# Altium PCB TouchMyHeart.PcbDoc
Units mm, origin at the board's own origin, x right, y up, seen from the top; angles counter-clockwise.
Board outline 75.71 x 66.14 mm, 2 copper layers (Top Layer, Bottom Layer); 62 components, 52 nets, 167 pads, 90 vias.
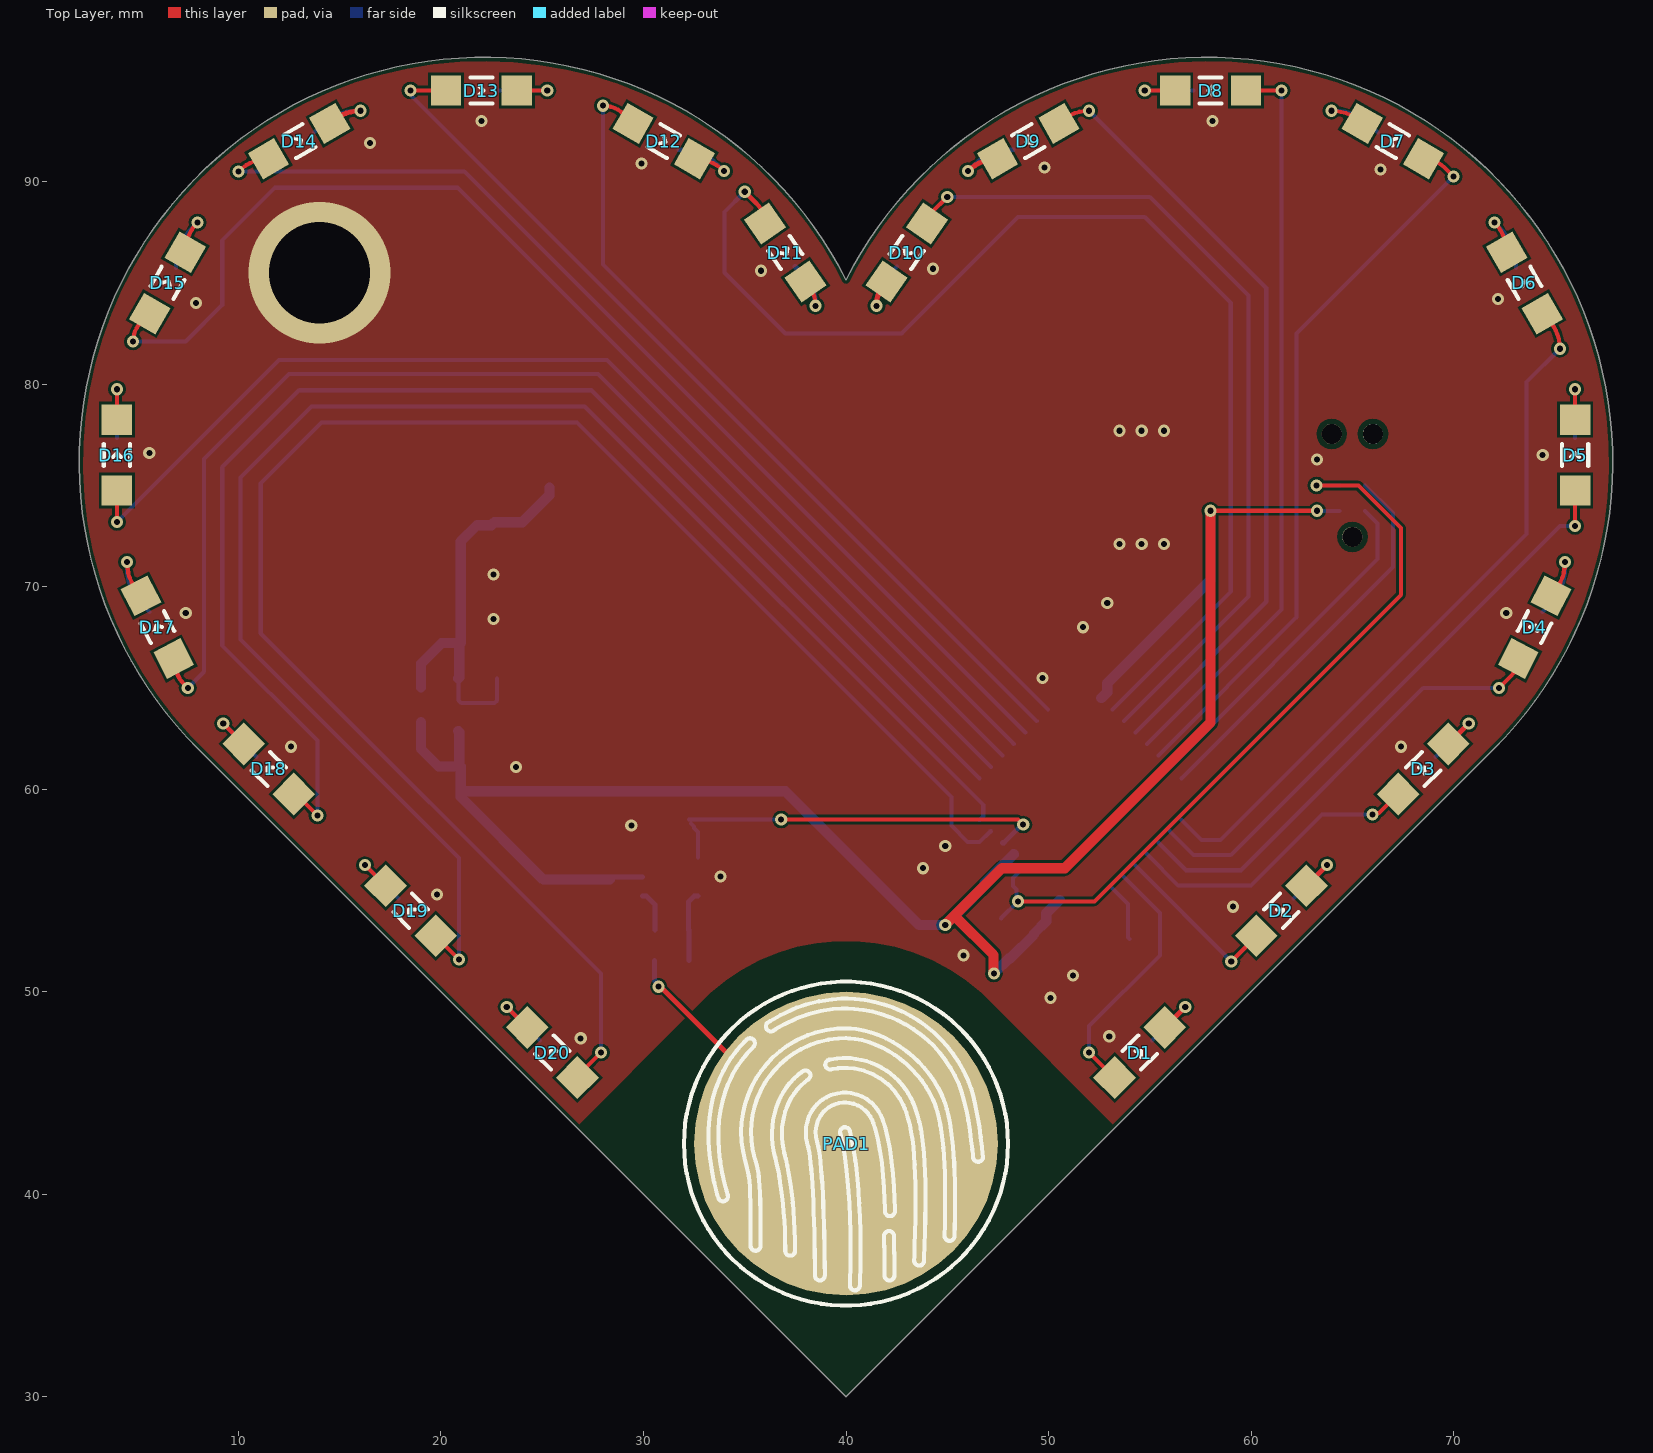
[diagram p0: Top Layer view]
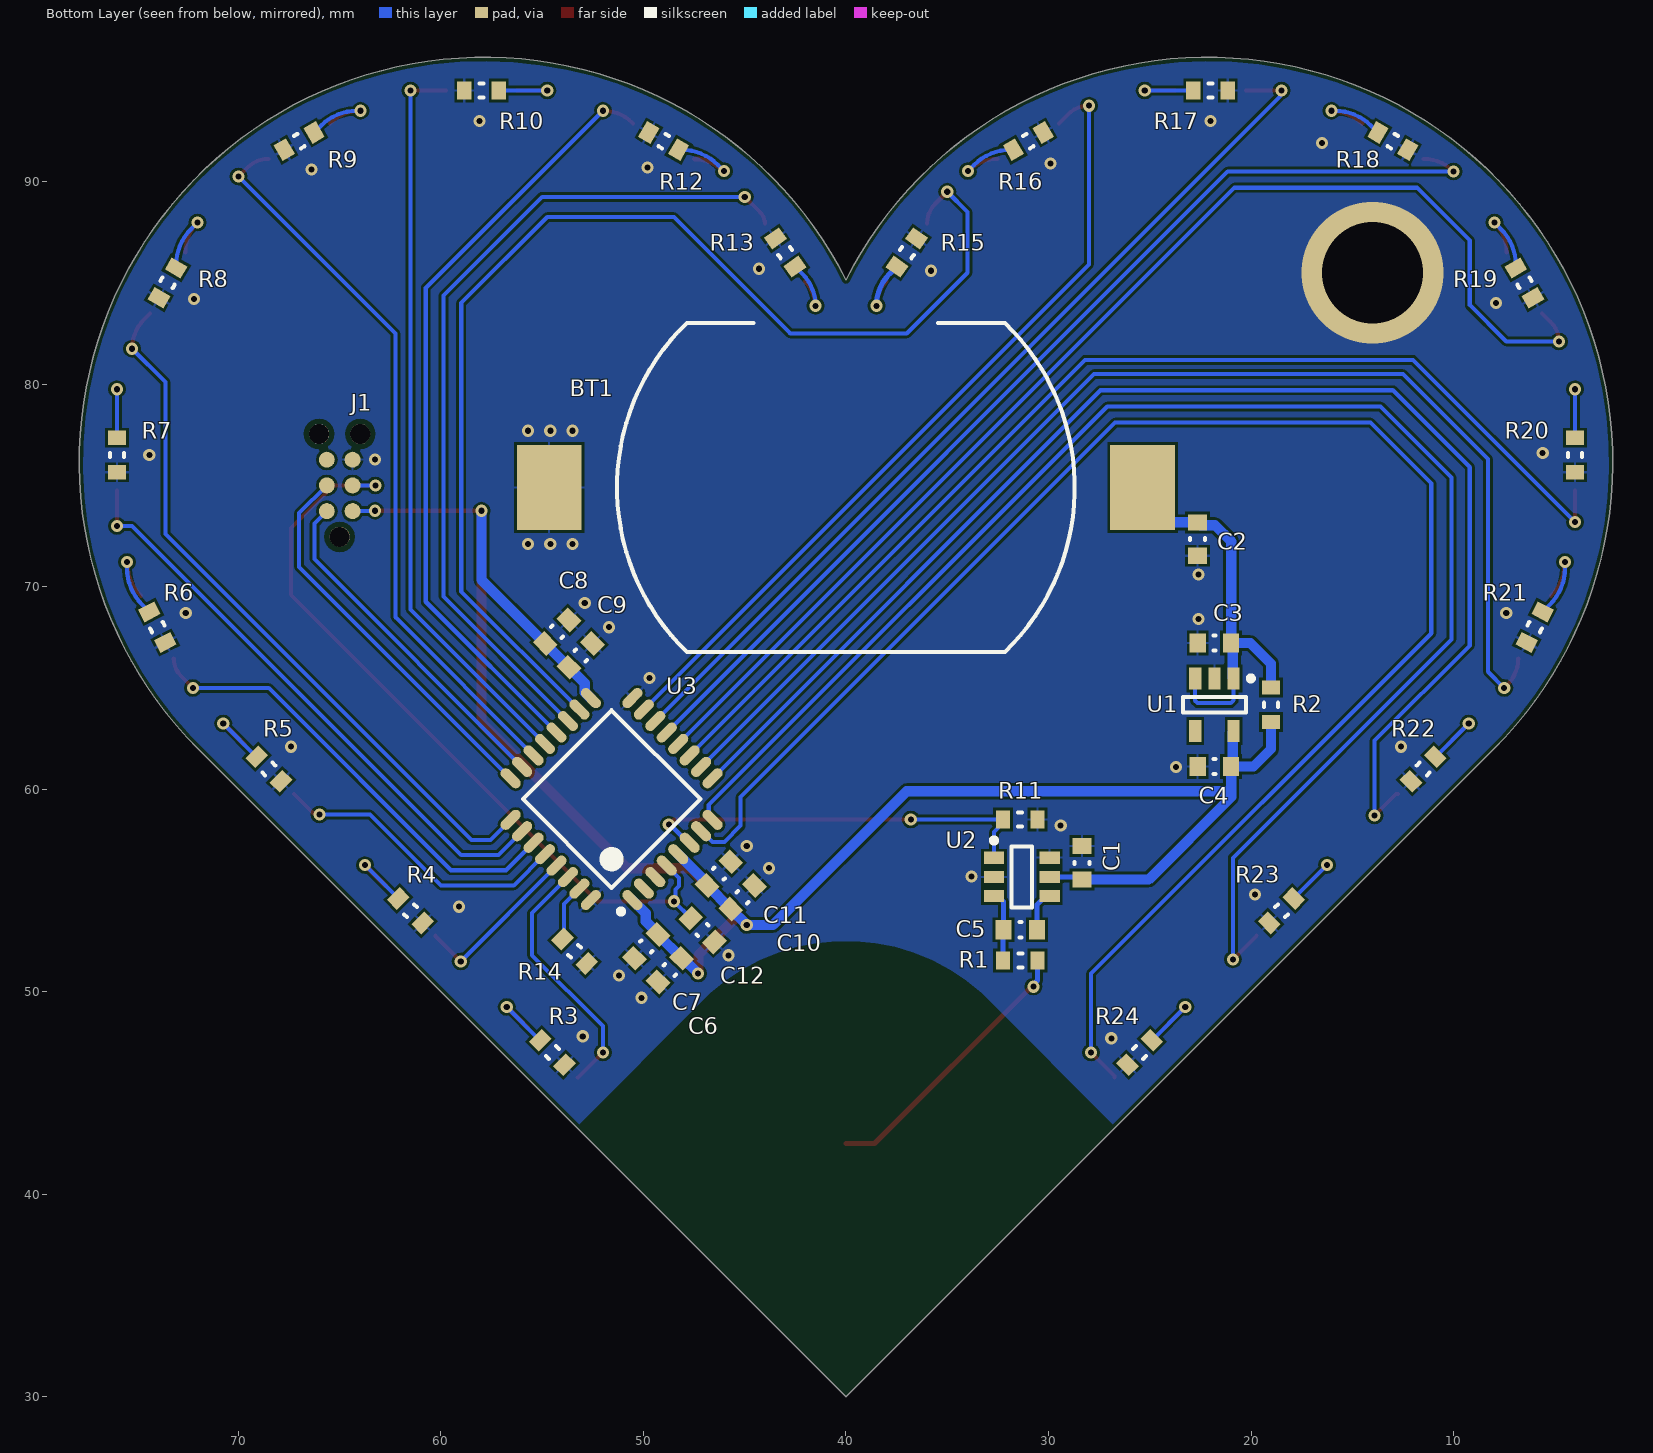
[diagram p1: Bottom Layer view, seen from below]
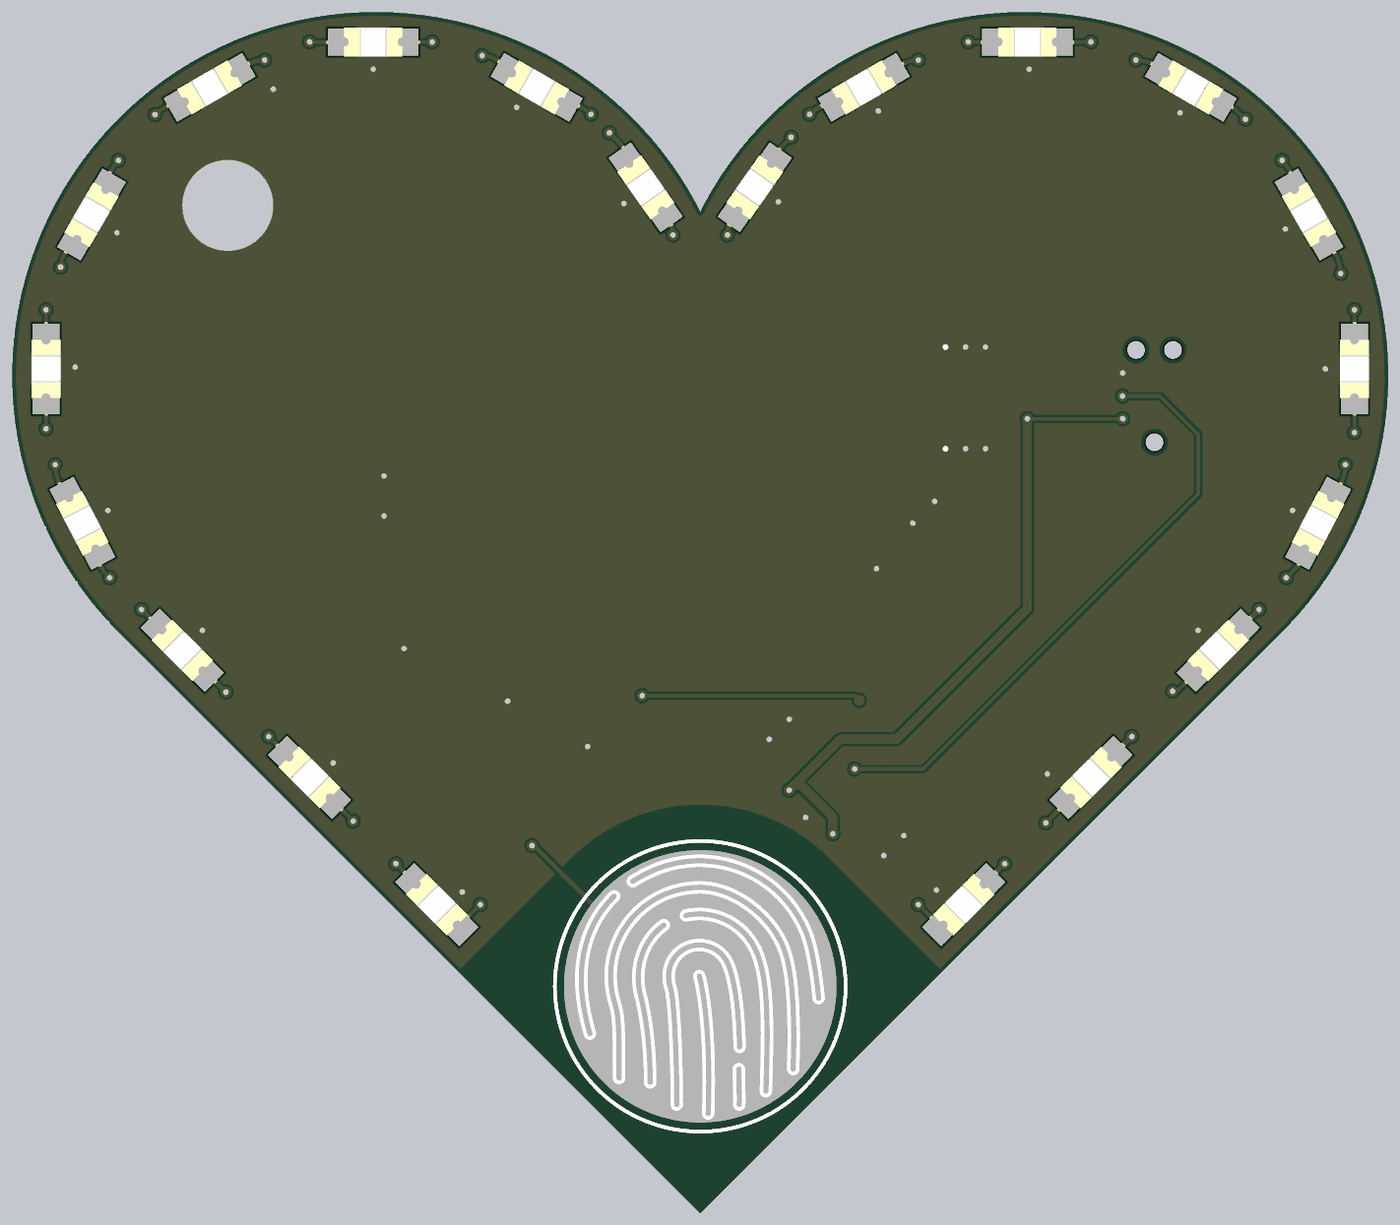
[diagram p2: 3D render of the assembled board from above, using the file's embedded part models]
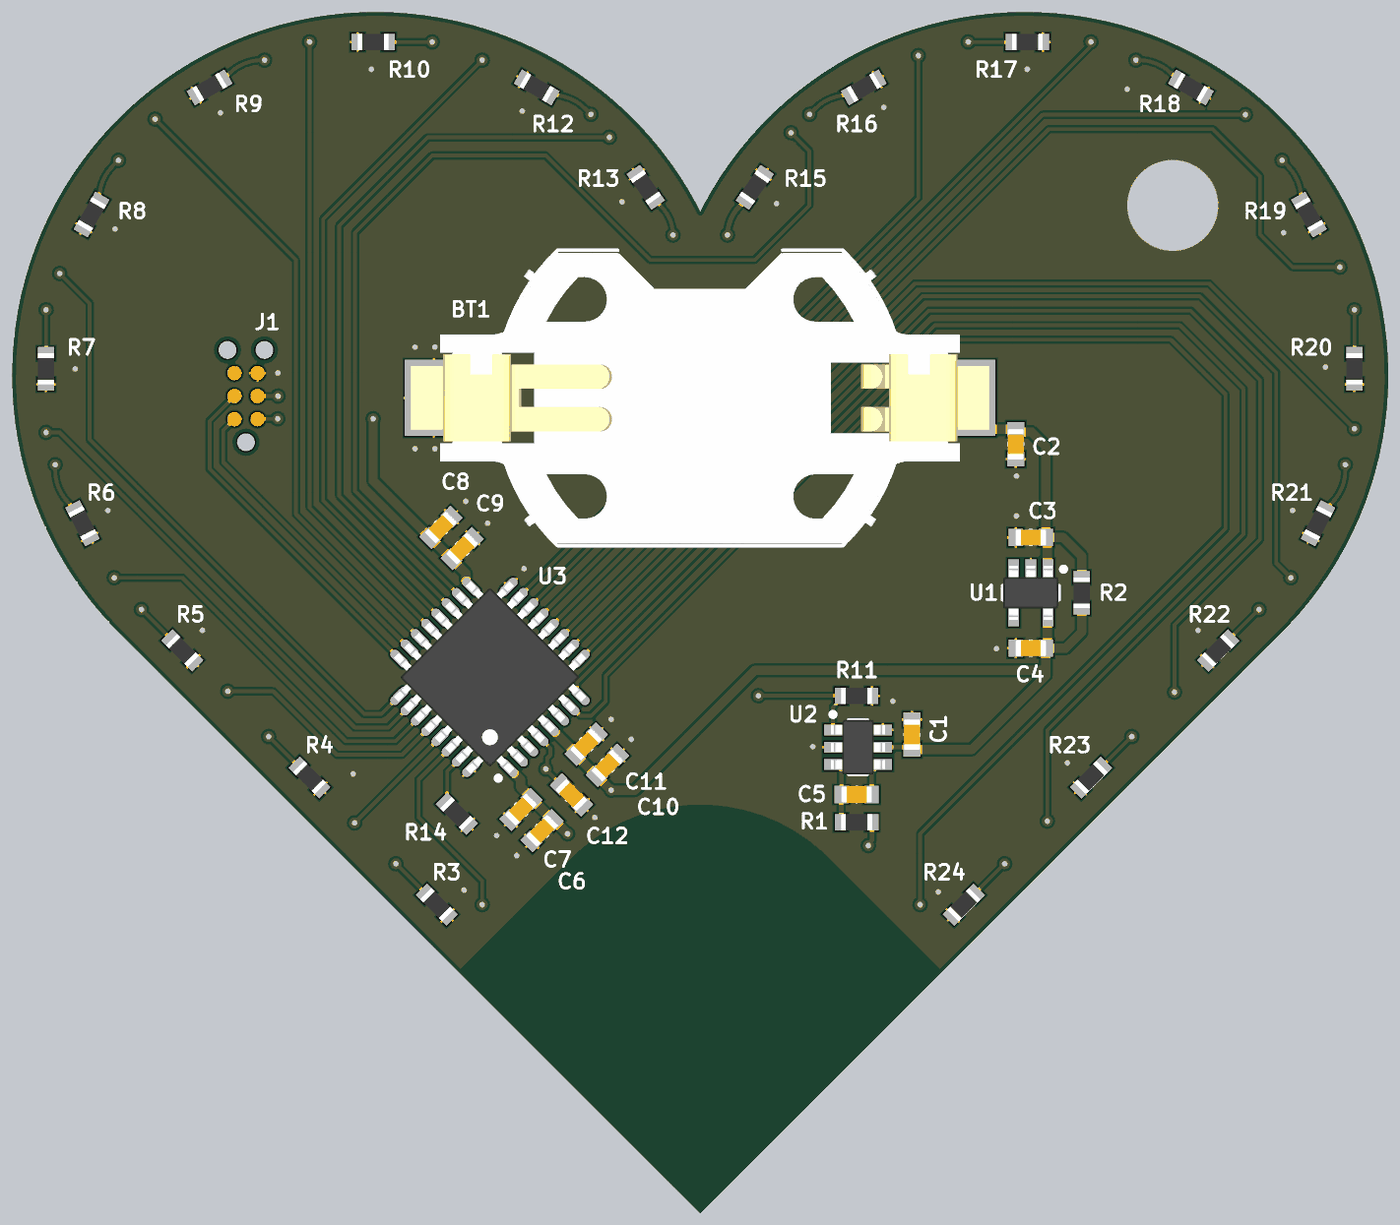
[diagram p3: 3D render of the assembled board from below, using the file's embedded part models]

## Layer stack, top to bottom
Top Solder: solder mask 0.0102, Solder Resist, Dk 3.5
Top Layer: signal copper 0.0356
Dielectric 1: dielectric 0.32, FR-4, Dk 4.8
Bottom Layer: signal copper 0.0356
Bottom Solder: solder mask 0.0102, Solder Resist, Dk 3.5

## Board outline
40,30 8,62 cw(c22.142,76.142) 40,85.148 cw(c57.858,76.142) 72,62

## Design rules (kind name [scope] priority, off if disabled: settings)
BoardOutlineClearance [All] p1: gap=0.2 ignorepadtopadclearanceinfootprint=FALSE
Clearance [All] p1: gap=0.127 ignorepadtopadclearanceinfootprint=FALSE except(0.25: Arc-Hole Track-Hole SMDPad-Hole THPad-Hole Via-Hole Fill-Hole Poly-Hole Region-Hole Text-Hole)
ComponentClearance [All] p1: gap=0.127 collisioncheckmode=3 verticalgap=0.127 showdistances=TRUE
DiffPairsRouting [All] p1: maxlimit=0.254 minlimit=0.127 mostfreqgap=0.127 toplayer_minwidth=0.127 toplayer_maxwidth=25.4 toplayer_prefwidth=0.127 bottomlayer_minwidth=0.127 bottomlayer_maxwidth=25.4 bottomlayer_prefwidth=0.127 maxuncoupledlength=12.7
Height [All] p1: minheight=0 maxheight=1816.048 prefheight=12.7
HoleSize [All] p1: absolutevalues=TRUE maxlimit=6.3 minlimit=0.3 maxpercent=80.000 minpercent=20.000
HoleToHoleClearance [All] p1: gap=0.25 allowstackedmicrovias=FALSE
MinimumAnnularRing [All] p1: minimumring=0.076
MinimumSolderMaskSliver [All] p1: minsoldermaskwidth=0
PlaneClearance [All] p1: clearance=0.127
PlaneConnect PlaneConnectPowerPads [InPadClass('PowerPads')] p1: planeconnectstyle=Direct reliefexpansion=0.508 reliefentries=4 reliefconductorwidth=0.254 reliefairgap=0.254
PlaneConnect [All] p2: pad.planeconnectstyle=Relief pad.reliefexpansion=0.3 pad.reliefentries=4 pad.reliefconductorwidth=0.127 pad.reliefairgap=0.127 via.planeconnectstyle=Direct via.reliefexpansion=0.3 via.reliefentries=4 via.reliefconductorwidth=0.127 via.reliefairgap=0.127
PolygonConnect PolygonConnectPowerPads [All vs (InPadClass('PowerPads'))] p1: connectstyle=Direct reliefconductorwidth=0.254 reliefentries=4 polygonreliefangle="90 Angle" airgapwidth=0.254
PolygonConnect [All] p2: thpad.connectstyle=Relief thpad.reliefconductorwidth=0.127 thpad.reliefentries=4 thpad.polygonreliefangle="90 Angle" thpad.airgapwidth=0.127 smdpad.connectstyle=Relief smdpad.reliefconductorwidth=0.127 smdpad.reliefentries=4 smdpad.polygonreliefangle="90 Angle" smdpad.airgapwidth=0.127 via.connectstyle=Direct via.reliefconductorwidth=0.127 via.reliefentries=4 via.polygonreliefangle="90 Angle" via.airgapwidth=0.127
RoutingVias [All] p1: holewidth=0.3 width=0.6 viastyle="Through Hole" minholewidth=0.3 minwidth=0.6 maxholewidth=0.6 maxwidth=6.6
SilkToSilkClearance [All] p1: silktosilkclearance=0
SilkToSolderMaskClearance [IsPad] p1: minsilkscreentomaskgap=0.127 clearancetoexposedcopper=TRUE
SolderMaskExpansion SolderMaskExpansion_Via [isVia] p1: expansion=0.102 istentingtop=TRUE
SolderMaskExpansion [All] p2: expansion=0.075 istentingtop=FALSE
Width [All] p1: maxlimit=25.4 minlimit=0.127 preferedwidth=0.127 minimp=50.000000 maximp=50.000000 favimp=50.000000
20 further rules are at their usual default settings.

## Components (designator, comment, footprint, x,y, rotation, side; value= is the part's Value field where it differs from the comment)
BT1 "BU2032SM-BT-GTR" BU2032SM-BT-GTR 40.007,74.9 r0 bottom
C1 "Capacitor" CAPC1608X09N 28.345,56.364 r270 bottom value=0.1uF
C2 "Capacitor" CAPC1608X09N 22.64,72.351 r90 bottom value=1uF
C3 "Capacitor" CAPC1608X09N 21.809,67.218 r180 bottom value=1uF
C4 "Capacitor" CAPC1608X09N 21.809,61.122 r180 bottom value=1uF
C5 "Capacitor" CAPC1608X09N 31.393,53.062 r0 bottom value=10nF
C6 "Capacitor" CAPC1608X09N 48.699,51.073 r135 bottom value=1uF
C7 "Capacitor" CAPC1608X09N 49.867,52.24 r135 bottom value=0.1uF
C8 "Capacitor" CAPC1608X09N 54.267,67.776 r315 bottom value=1uF
C9 "Capacitor" CAPC1608X09N 53.1,66.608 r315 bottom value=0.1uF
C10 "Capacitor" CAPC1608X09N 45.107,54.665 r315 bottom value=1uF
C11 "Capacitor" CAPC1608X09N 46.275,55.832 r315 bottom value=0.1uF
C12 "Capacitor" CAPC1608X09N 47.083,53.048 r45 bottom value=0.1uF
D1 "LED" DIOC3216X11N 54.5,47 r45 top
D2 "LED" DIOC3216X11N 61.5,54 r45 top
D3 "LED" DIOC3216X11N 68.5,61 r45 top
D4 "LED" DIOC3216X11N 74,68 r62.5 top
D5 "LED" DIOC3216X11N 76,76.5 r90 top
D6 "LED" DIOC3216X11N 73.5,85 r120 top
D7 "LED" DIOC3216X11N 67,92 r150 top
D8 "LED" DIOC3216X11N 58,94.5 r180 top
D9 "LED" DIOC3216X11N 49,92 r210 top
D10 "LED" DIOC3216X11N 43,86.5 r235 top
D11 "LED" DIOC3216X11N 37,86.5 r305 top
D12 "LED" DIOC3216X11N 31,92 r330 top
D13 "LED" DIOC3216X11N 22,94.5 r0 top
D14 "LED" DIOC3216X11N 13,92 r30 top
D15 "LED" DIOC3216X11N 6.5,85 r60 top
D16 "LED" DIOC3216X11N 4,76.5 r90 top
D17 "LED" DIOC3216X11N 6,68 r117.5 top
D18 "LED" DIOC3216X11N 11.5,61 r135 top
D19 "LED" DIOC3216X11N 18.5,54 r135 top
D20 "LED" DIOC3216X11N 25.5,47 r135 top
J1 "TC2030-NL" TC2030-NL 65,75 r90 bottom
PAD1 "" CAPACTIVE_TOUCH 40,42.5 r0 top
R1 "Resistor" RESC1608X06N 31.393,51.538 r0 bottom value=10k
R2 "Resistor" RESC1608X06N 19.015,64.17 r90 bottom value=0
R3 "Resistor" RESC1608X06N 54.5,47 r225 bottom value=1k
R4 "Resistor" RESC1608X06N 61.5,54 r225 bottom value=1k
R5 "Resistor" RESC1608X06N 68.5,61 r225 bottom value=1k
R6 "Resistor" RESC1608X06N 74,68 r242.5 bottom value=1k
R7 "Resistor" RESC1608X06N 76,76.5 r270 bottom value=1k
R8 "Resistor" RESC1608X06N 73.5,85 r300 bottom value=1k
R9 "Resistor" RESC1608X06N 67,92 r330 bottom value=1k
R10 "Resistor" RESC1608X06N 58,94.5 r0 bottom value=1k
R11 "Resistor" RESC1608X06N 31.4,58.5 r0 bottom value=100k
R12 "Resistor" RESC1608X06N 49,92 r30 bottom value=1k
R13 "Resistor" RESC1608X06N 43,86.5 r55 bottom value=1k
R14 "Resistor" RESC1608X06N 53.4,52 r45 bottom value=10k
R15 "Resistor" RESC1608X06N 37,86.5 r125 bottom value=1k
R16 "Resistor" RESC1608X06N 31,92 r150 bottom value=1k
R17 "Resistor" RESC1608X06N 22,94.5 r180 bottom value=1k
R18 "Resistor" RESC1608X06N 13,92 r210 bottom value=1k
R19 "Resistor" RESC1608X06N 6.5,85 r240 bottom value=1k
R20 "Resistor" RESC1608X06N 4,76.5 r270 bottom value=1k
R21 "Resistor" RESC1608X06N 6,68 r297.5 bottom value=1k
R22 "Resistor" RESC1608X06N 11.5,61 r315 bottom value=1k
R23 "Resistor" RESC1608X06N 18.5,54 r315 bottom value=1k
R24 "Resistor" RESC1608X06N 25.5,47 r315 bottom value=1k
U1 "TLV75533PDBVR" SOT95P280X145-5N 21.809,64.17 r270 bottom
U2 "AT42QT1011-TSHR" SOT95P280X145-6N 31.32,55.669 r180 bottom
U3 "STM32L031K6T6" TQFP80P900X900X160-32N 51.573,59.514 r45 bottom

## Footprints (in the part's own frame and the unit in brackets; to place one, negate y for a bottom-side part, rotate by r counter-clockwise, add the part's x,y. Pads: shape width x height; smd on the part's side, far side on the other; paste and mask are expansions set on the pad)
BU2032SM-BT-GTR [mm] "BATTERY HOLDER COIN 20MM SMD"
  rect 3.2x4.2 smd: B+(-14.65,0) B-(14.65,0)
  silkscreen extent -11.3,-8.13 11.3,8.13, body extent -15.93,-8 15.93,8, height 5.2
CAPACTIVE_TOUCH [mm] "Capactive touch button"
  round 15 smd mask+0.102: 1(0,0)
  silkscreen extent -8,-8 8,8
CAPC1608X09N [mm] "Chip Capacitor, 2-Leads, Body 1.60x0.80mm, IPC Medium Density"
  rect 0.8x0.95 smd: 1(-0.825,0) 2(0.825,0)
  silkscreen extent -0.05,-0.38 0.05,0.38, body extent -0.85,-0.45 0.85,0.45, height 0.9
DIOC3216X11N [mm] "Chip Diode, 2-Leads, Body 3.20x1.60mm, IPC Medium Density"
  rect 1.5x1.5 smd: 1(-1.75,0) 2(1.75,0)
  silkscreen extent -0.55,-0.65 0.55,0.65, body extent -1.6,-0.8 1.6,0.8, height 1.1
RESC1608X06N [mm] "Chip Resistor, 2-Leads, Body 1.60x0.80mm, IPC Medium Density"
  rect 0.7x0.9 smd: 1(-0.85,0) 2(0.85,0)
  silkscreen extent -0.1,-0.35 0.1,0.35, body extent -0.85,-0.45 0.85,0.45, height 0.55
SOT95P280X145-5N [mm] "SOT23, 5-Leads, Body 2.90x2.80mm, Pitch 0.95mm, IPC Medium Density"
  rect 1.1x0.6 smd: 1(-1.3,0.95) 2(-1.3,0) 3(-1.3,-0.95) 4(1.3,-0.95) 5(1.3,0.95)
  silkscreen extent -1.42,-1.55 0.38,1.92, body extent -1.5,-1.53 1.5,1.52, height 1.45
SOT95P280X145-6N [mm] "SOT23, 6-Leads, Body 2.90x2.80mm, Pitch 0.95mm, IPC Medium Density"
  rect 1x0.6 smd: 1(-1.375,0.95) 2(-1.375,0) 3(-1.375,-0.95) 4(1.375,-0.95) 5(1.375,0) 6(1.375,0.95)
  silkscreen extent -1.5,-1.5 0.5,1.92, body extent -1.5,-1.5 1.5,1.5, height 1.45
TC2030-NL [mil] "6-Pin Tag-Connect"
  round 30.98 smd paste-39.37: 1(-50,-25) 2(-50,25) 3(0,-25) 4(0,25) 5(50,-25) 6(50,25)
  round 39.02 hole 39.02 unplated: ""(-100,0) ""(100,-40) ""(100,40)
TQFP80P900X900X160-32N [mm] "TQFP, 32-Leads, Body 7.00x7.00mm, Pitch 0.80mm, IPC Medium Density"
  oval 1.2x0.5 smd: 1(-4.25,2.8) 2(-4.25,2) 3(-4.25,1.2) 4(-4.25,0.4) 5(-4.25,-0.4) 6(-4.25,-1.2) 7(-4.25,-2) 8(-4.25,-2.8) 17(4.25,-2.8) 18(4.25,-2) 19(4.25,-1.2) 20(4.25,-0.4) 21(4.25,0.4) 22(4.25,1.2) 23(4.25,2) 24(4.25,2.8)
  oval 0.5x1.2 smd: 9(-2.8,-4.25) 10(-2,-4.25) 11(-1.2,-4.25) 12(-0.4,-4.25) 13(0.4,-4.25) 14(1.2,-4.25) 15(2,-4.25) 16(2.8,-4.25) 25(2.8,4.25) 26(2,4.25) 27(1.2,4.25) 28(0.4,4.25) 29(-0.4,4.25) 30(-1.2,4.25) 31(-2,4.25) 32(-2.8,4.25)
  silkscreen extent -4.37,-3.1 3.1,3.72, body extent -4.5,-4.5 4.5,4.5, height 1.6

## Part data
BT1: "BATTERY HOLDER COIN 20MM SMD", Case/Package=SMD/SMT, Manufacturer="Memory Protection Devices", Max Operating Temperature=280°C, Min Operating Temperature=-40°C, Package Quantity=400, Category=Uncategorized, ComponentLink1Description=https://datasheet.ciiva.com/4/bu2032sm-bt-gtr-datasheet-4065.pdf?src-supplier=Digi-Key, ComponentLink1URL=https://datasheet.ciiva.com/4/bu2032sm-bt-gtr-datasheet-4065.pdf?src-supplier=Digi-Key, ComponentLink2Description=https://datasheet.ciiva.com/7613/bu2032sm-bt-gtr-datasheet-7613477.pdf?src-supplier=Digi-Key, ComponentLink2URL=https://datasheet.ciiva.com/7613/bu2032sm-bt-gtr-datasheet-7613477.pdf?src-supplier=Digi-Key, ComponentLink3Description=https://datasheet.ciiva.com/7613/bu2032sm-bt-gtr-datasheet-7613478.pdf?src-supplier=Digi-Key, ComponentLink3URL=https://datasheet.ciiva.com/7613/bu2032sm-bt-gtr-datasheet-7613478.pdf?src-supplier=Digi-Key, Manufacturer Part Number=BU2032SM-BT-GTR, Mount="Surface Mount,PCB", Number of Cells=1, Pricing 1="1=0.85000, 10=0.71300, 50=0.62520, 100=0.58940 (USD)", RoHS=Yes, Stock 1=7659, Supplier 1=Digi-Key, Termination=SMD/SMT
C1 C5 C7 C9 C11 C12: "General purpose capacitor", Package=0603, Rated Voltage=50V
C2 C3 C4 C6 C8 C10: "General purpose capacitor", Package=0603, Rated Voltage=25V
D1 D2 D3 D4 D5 D6 D7 D8 D9 D10 D11 D12 D13 D14 D15 D16 D17 D18 D19 D20: "General purpose LED"
J1: "6-Pin No-Legs Tag-Connect Plug-of-Nails™ Cable with Ribbon Connector"
PAD1: library part CAPACITIVE_TOUCH, "Capacitive Touch Button"
R1 R2 R3 R4 R5 R6 R7 R8 R9 R10 R11 R12 R13 R14 R15 R16 R17 R18 R19 R20 R21 R22 R23 R24: "General purpose resistor", Package=0603
  R2: Note="NO STUFF"
U1: "IC REG LINEAR 3.3V 500MA SOT23-5", Manufacturer="Texas Instruments", Max Operating Temperature=125°C, Min Operating Temperature=-40°C, ComponentLink1Description=http://www.ti.com/lit/ds/symlink/tlv755p.pdf?src-supplier=Digi-Key, ComponentLink1URL=http://www.ti.com/lit/ds/symlink/tlv755p.pdf?src-supplier=Digi-Key, Manufacturer Part Number=TLV75533PDBVR, Pricing 1="1=0.63000, 10=0.55100, 100=0.39250, 500=0.31730, 1000=0.24215 (USD)", RoHS=No, Stock 1=25120, Supplier 1=Digi-Key
U2: "Touch Sensor IC 6-Pin SOT-23, HOLD", Case/Package=SOT-23-6, Load Capacitance=50pF, Manufacturer="Microchip / Atmel", Max Operating Temperature=85°C, Max Supply Voltage=5.5V, Min Operating Temperature=-40°C, Min Supply Voltage=1.8V, Nominal Supply Current=729uA, Operating Supply Current=378.5uA, Package Quantity=4500, Category=Uncategorized, ComponentLink1Description=https://datasheet.ciiva.com/14094/at42qt1011-eng-tds-14094872.pdf?src-supplier=Distrelec, ComponentLink1URL=https://datasheet.ciiva.com/14094/at42qt1011-eng-tds-14094872.pdf?src-supplier=Distrelec, ComponentLink2Description=https://datasheet.ciiva.com/1165/731627-1165685.pdf?src-supplier=Element14, ComponentLink2URL=https://datasheet.ciiva.com/1165/731627-1165685.pdf?src-supplier=Element14, ComponentLink3Description=https://datasheet.ciiva.com/1403/doc8287-1403456.pdf?src-supplier=Digi-Key, ComponentLink3URL=https://datasheet.ciiva.com/1403/doc8287-1403456.pdf?src-supplier=Digi-Key, ComponentLink4Description=https://datasheet.ciiva.com/1403/doc8287-1403458.pdf?src-supplier=Digi-Key, ComponentLink4URL=https://datasheet.ciiva.com/1403/doc8287-1403458.pdf?src-supplier=Digi-Key, ComponentLink5Description=https://datasheet.ciiva.com/15222/getdatasheetpartid-463081-15222284.pdf?src-supplier=Verical, ComponentLink5URL=https://datasheet.ciiva.com/15222/getdatasheetpartid-463081-15222284.pdf?src-supplier=Verical, ComponentLink6Description=https://datasheet.ciiva.com/1403/doc8287-1403457.pdf?src-supplier=Digi-Key, ComponentLink6URL=https://datasheet.ciiva.com/1403/doc8287-1403457.pdf?src-supplier=Digi-Key, Height=1.3mm, Lead Free="Lead Free", Length=3mm, Manufacturer Part Number=AT42QT1011-TSHR, Mount="Surface Mount", Number of Channels=1, Number of Inputs=1, Number of Pins=6, Packaging="Tape and Reel", Pricing 1="4500=0.48000 (USD)", REACH SVHC="No SVHC", Resolution=14b, RoHS=Yes, Supplier 1=Digi-Key, Touchscreen=Capacitive, Width=1.75mm
U3: "IC MCU 32BIT 32KB FLASH 32LQFP", Case/Package=LQFP, Frequency=32MHz, Manufacturer=STMicroelectronics, Max Operating Temperature=85°C, Max Supply Voltage=3.6V, Min Operating Temperature=-40°C, Min Supply Voltage=1.65V, Package Quantity=1500, Category=Microcontrollers, ComponentLink1Description=https://datasheet.ciiva.com/70238/en-dm00140359-70238919.pdf?src-supplier=Digi-Key, ComponentLink1URL=https://datasheet.ciiva.com/70238/en-dm00140359-70238919.pdf?src-supplier=Digi-Key, Core Architecture=ARM, Data Bus Width=32b, Interface=I2C,SPI,UART, Manufacturer Part Number=STM32L031K6T6, Max Frequency=32MHz, Memory Size=32KB, Memory Type=FLASH, Number of ADC Channels=10, Number of I/Os=38, Oscillator Type=Internal, Packaging=Tray, Peripherals="Brown-out Detect/Reset,POR,PWM,WDT,DMA", Pricing 1="1=3.29000, 10=2.95300, 25=2.78600, 100=2.37360, 250=2.22872, 500=1.95012, 1500=1.61581, 3000=1.50437, 6000=1.44866 (USD)", RAM Size=8KB, RoHS=No, Stock 1=2299, Supplier 1=Digi-Key

## Via types
v1: diameter 0.6, hole 0.3, Top Layer to Bottom Layer, tented both sides, 89 vias
v2: diameter 7, hole 5, Top Layer to Bottom Layer, 1 vias

## Nets (pads, with @x,y where several pads share a name; then routed paths per layer and width w, separated by ;. In a path a pad name is that pad's centre, name@x,y a point inside that pad or via, vN(x,y) a via of type N, cw(c..) or ccw(c..) an arc to the next point about the centre after c; other vN are vias at no path point)
3V3: C1.2 C4.2 C6.2 C7.2 C8.2 C9.2 C10.2 C11.2 J1.1 R2.1 U1.5 U2.5 U3.1 U3.5 U3.17 | length 103.4
  Top Layer w0.203: v1(58,73.75) v1(63.25,73.75)
  Top Layer w0.508: v1(44.9,53.3) 45.35,53.75 ; v1(47.3,50.9) 47.282,50.918 47.282,51.818 45.35,53.75 ; v1(58,73.75) 58,63.3 50.8,56.1 47.7,56.1 45.35,53.75
  Bottom Layer w0.203: v1(63.25,73.75) 63.26,73.74 64.355,73.74 J1.1
  Bottom Layer w0.254: C1.2 28.475,55.669 U2.5
  Bottom Layer w0.508: R2.1 19.015,61.985 19.878,61.122 C4.2 ; U1.5 20.905,62.824 20.905,61.201 C4.2 ; C1.2 25.061,55.539 20.984,59.616 20.984,59.9 ; v1(47.3,50.9) 48.056,51.656 C6.2 C7.2 49.283,52.878 49.891,53.486 49.891,53.872 U3.1 ; U3.5 46.858,55.365 C11.2 C10.2 45.681,54.081 v1(44.9,53.3) 43.6,53.3 37,59.9 20.984,59.9 ; U3.17 52.893,64.794 52.893,65.235 C9.2 C8.2 58,70.342 v1(58,73.75) ; 20.984,59.9 C4.2
GND: BT1.B- C1.1 C2.1 C3.1 C4.1 C6.1 C7.1 C8.1 C9.1 C10.1 C11.1 C12.1 J1.5 R3.2 R4.2 R5.2 R6.2 R7.2 R8.2 R9.2 R10.2 R11.1 R12.2 R13.2 R14.1 R15.2 R16.2 R17.2 R18.2 R19.2 R20.2 R21.2 R22.2 R23.2 R24.2 U1.2 U2.2 U2.6 U3.16 U3.32
  other v1: 26.9,47.7 53,47.8 50.1,49.7 51.2,50.8 45.8,51.8 59.1,54.2 19.8,54.8 33.804,55.697 43.8,56.1 44.9,57.2 29.4,58.2 23.7,61.1 12.6,62.1 67.4,62.1 49.7,65.5 51.7,68 22.6,68.4 7.4,68.7 72.6,68.7 52.9,69.2 22.6,70.6 53.5,72.1 54.6,72.1 55.7,72.1 63.25,76.275 74.4,76.5 5.6,76.6 53.5,77.7 54.6,77.7 55.7,77.7 7.9,84 72.2,84.2 35.8,85.6 44.3,85.7 66.4,90.6 49.8,90.7 29.9,90.9 16.5,91.9 22,93 58.1,93
  other v2: 14,85.5
LED1: D1.1 U3.30 | length 12.6
  Top Layer w0.203: v1(52,47) 53.237,45.763 D1.1
  Bottom Layer w0.203: v1(52,47) 52,48.3 55.5,51.8 55.5,53.89 U3.30
LED2: D2.1 U3.29 | length 8.5
  Top Layer w0.203: v1(59.021,51.5) 60.263,52.741 D2.1
  Bottom Layer w0.203: U3.29 v1(59.021,51.5)
LED3: D3.1 U3.28 | length 14.9
  Top Layer w0.203: v1(66,58.75) 66.076,58.826 66.326,58.826 D3.1
  Bottom Layer w0.203: U3.28 56.403,55.25 60,55.25 63.5,58.75 v1(66,58.75)
LED4: D4.1 U3.27 | length 22.9
  Top Layer w0.203: v1(72.25,65) 72.834,65.584 ccw(c71.971,66.448) D4.1
  Bottom Layer w0.203: U3.27 56.784,56 59.5,56 68.5,65 v1(72.25,65)
LED5: D5.1 U3.26 | length 29
  Top Layer w0.203: v1(76,73) D5.1
  Bottom Layer w0.203: U3.26 57.165,56.75 59,56.75 75.25,73 v1(76,73)
LED6: D6.1 U3.25 | length 35.5
  Top Layer w0.203: D6.1 74.642,83.217 cw(c73.175,81.75) v1(75.25,81.75)
  Bottom Layer w0.203: U3.25 57.547,57.5 58.5,57.5 73.6,72.6 73.6,80.1 v1(75.25,81.75)
LED7: D7.1 U3.22 | length 36.4
  Top Layer w0.203: D7.1 cw(c68.516,89.654) 69.556,90.694 v1(70,90.25)
  Bottom Layer w0.203: U3.22 62.25,68.494 62.25,82.5 v1(70,90.25)
LED8: D8.1 U3.21 | length 36.8
  Top Layer w0.203: D8.1 v1(61.5,94.5)
  Bottom Layer w0.203: U3.21 61.5,68.875 v1(61.5,94.5)
LED9: D9.1 U3.20 | length 38.6
  Top Layer w0.203: D9.1 50.533,92.892 cw(c52,91.425) v1(52,93.5)
  Bottom Layer w0.203: v1(52,93.5) 60.75,84.75 60.75,69.257 U3.20
LED10: D10.1 U3.19 | length 42.1
  Top Layer w0.203: D10.1 cw(c44.777,87.934) 44.23,88.48 v1(45,89.25)
  Bottom Layer w0.203: v1(45,89.25) 55,89.25 59.871,84.379 59.871,69.509 U3.19
LED11: D11.1 U3.18 | length 59.2
  Top Layer w0.203: v1(35,89.5) 35.593,88.907 cw(c34.62,87.934) D11.1
  Bottom Layer w0.203: v1(35,89.5) 34,88.5 34,85.5 37,82.5 42.75,82.5 48.5,88.25 54.75,88.25 59,84 59,69.769 U3.18
LED12: D12.1 U3.15 | length 40.7
  Top Layer w0.203: v1(28,93.75) cw(c28,92.279) 29.04,93.319 D12.1
  Bottom Layer w0.203: v1(28,93.75) 28,85.915 U3.15
LED13: D13.1 U3.14 | length 45.7
  Top Layer w0.203: v1(18.5,94.5) D13.1
  Bottom Layer w0.203: v1(18.5,94.5) 18.576,94.424 18.576,94.208 U3.14
LED14: D14.1 U3.13 | length 52
  Top Layer w0.203: v1(10,90.5) 10.017,90.517 cw(c11.484,89.05) D14.1
  Bottom Layer w0.203: v1(10,90.5) 21.153,90.5 U3.13
LED15: D15.1 U3.12 | length 61.6
  Top Layer w0.203: v1(4.8,82.1) cw(c6.151,82.1) 5.196,83.055 D15.1
  Bottom Layer w0.203: v1(4.8,82.1) 7.4,82.1 9.2,83.9 9.2,87.1 11.8,89.7 20.821,89.7 U3.12
LED16: D16.1 U3.11 | length 56.7
  Top Layer w0.203: v1(4,73.2) D16.1
  Bottom Layer w0.203: v1(4,73.2) 12,81.2 28.19,81.2 U3.11
LED17: D17.1 U3.10 | length 61.9
  Top Layer w0.203: D17.1 ccw(c8.633,66.448) 7.342,65.158 v1(7.5,65)
  Bottom Layer w0.203: v1(7.5,65) 8.3,65.8 8.3,76.3 12.5,80.5 27.759,80.5 U3.10
LED18: D18.1 U3.9 | length 67.6
  Top Layer w0.203: D18.1 12.837,59.763 v1(13.9,58.7)
  Bottom Layer w0.203: v1(13.9,58.7) 13.9,62.4 9.2,67.1 9.2,75.898 13.002,79.7 27.427,79.7 U3.9
LED19: D19.1 U3.8 | length 77
  Top Layer w0.203: D19.1 v1(20.9,51.6)
  Bottom Layer w0.203: v1(20.9,51.6) 20.9,56.6 10.1,67.4 10.1,75.4 13.6,78.9 27.1,78.9 46.779,59.221 46.779,58.679 U3.8
LED20: D20.1 U3.7 | length 83.7
  Top Layer w0.203: D20.1 26.737,45.837 v1(27.9,47)
  Bottom Layer w0.203: v1(27.9,47) 27.9,50.9 11.1,67.7 11.1,75.1 14.1,78.1 26.713,78.1 45.2,59.613 45.2,58.2 46,57.4 46.6,57.4 47.123,57.923 U3.7
NetC5_1: C5.1 U2.4 | length 2
  Bottom Layer w0.254: U2.4 30.145,54.719 30.568,54.296 C5.1
NetC5_2: C5.2 R1.2 U2.3 | length 3.5
  Bottom Layer w0.254: R1.2 32.243,53.037 C5.2 32.218,54.443 32.495,54.719 U2.3
NetD1_2: D1.2 R3.1 | length 3.8
  Top Layer w0.254: D1.2 v1(56.75,49.25)
  Bottom Layer w0.203: R3.1 v1(56.75,49.25)
NetD2_2: D2.2 R4.1 | length 3.8
  Top Layer w0.254: D2.2 v1(63.75,56.25)
  Bottom Layer w0.203: R4.1 v1(63.75,56.25)
NetD3_2: D3.2 R5.1 | length 3.8
  Top Layer w0.254: D3.2 v1(70.75,63.25)
  Bottom Layer w0.203: R5.1 v1(70.75,63.25)
NetD4_2: D4.2 R6.1 | length 5
  Top Layer w0.203: D4.2 ccw(c73.138,71.223) v1(75.5,71.223) 75.5,70.914
  Bottom Layer w0.203: R6.1 74.756,69.118 ccw(c72.96,70.914) 75.5,70.914 v1(75.5,71.223)
NetD5_2: D5.2 R7.1 | length 3.9
  Top Layer w0.203: D5.2 v1(76,79.75)
  Bottom Layer w0.203: R7.1 v1(76,79.75)
NetD6_2: D6.2 R8.1 | length 4.2
  Top Layer w0.203: v1(72.017,87.983) cw(c70.55,86.516) D6.2
  Bottom Layer w0.203: v1(72.017,87.983) 72.331,87.669 cw(c70.535,85.873) 73.075,85.873 R8.1
NetD7_2: D7.2 R9.1 | length 4.3
  Top Layer w0.203: v1(63.976,93.5) cw(c63.976,91.366) D7.2
  Bottom Layer w0.203: v1(63.976,93.5) 64.137,93.5 cw(c64.137,90.96) 65.933,92.756 R9.1
NetD8_2: D8.2 R10.1 | length 3.9
  Top Layer w0.203: v1(54.75,94.5) D8.2
  Bottom Layer w0.203: v1(54.75,94.5) R10.1
NetD9_2: D9.2 R12.1 | length 4.2
  Top Layer w0.254: v1(46.017,90.517) cw(c47.484,89.05) D9.2
  Bottom Layer w0.203: v1(46.017,90.517) 46.331,90.831 cw(c48.127,89.035) 48.127,91.575 R12.1
NetD10_2: D10.2 R13.1 | length 3.6
  Top Layer w0.254: v1(41.5,83.868) cw(c43.194,83.868) D10.2
  Bottom Layer w0.203: v1(41.5,83.868) cw(c43.728,83.868) 42.153,85.444 R13.1
NetD11_2: D11.2 R15.1 | length 3.6
  Top Layer w0.203: D11.2 cw(c36.806,83.868) v1(38.5,83.868)
  Bottom Layer w0.254: R15.1 37.847,85.444 cw(c36.272,83.868) v1(38.5,83.868)
NetD12_2: D12.2 R16.1 | length 4.2
  Top Layer w0.203: D12.2 cw(c32.516,89.05) v1(33.983,90.517)
  Bottom Layer w0.203: R16.1 31.873,91.575 cw(c31.873,89.035) 33.669,90.831 v1(33.983,90.517)
NetD13_2: D13.2 R17.1 | length 3.9
  Top Layer w0.203: D13.2 v1(25.25,94.5)
  Bottom Layer w0.203: R17.1 v1(25.25,94.5)
NetD14_2: D14.2 R18.1 | length 4.3
  Top Layer w0.254: D14.2 cw(c16.024,91.366) v1(16.024,93.5)
  Bottom Layer w0.203: R18.1 14.067,92.756 cw(c15.863,90.96) 15.863,93.5 v1(16.024,93.5)
NetD15_2: D15.2 R19.1 | length 4.2
  Top Layer w0.203: D15.2 cw(c9.45,86.516) v1(7.983,87.983)
  Bottom Layer w0.203: R19.1 6.925,85.873 cw(c9.465,85.873) 7.669,87.669 v1(7.983,87.983)
NetD16_2: D16.2 R20.1 | length 3.9
  Top Layer w0.203: D16.2 v1(4,79.75)
  Bottom Layer w0.203: R20.1 v1(4,79.75)
NetD17_2: D17.2 R21.1 | length 4.7
  Top Layer w0.203: v1(4.5,71.223) ccw(c6.862,71.223) D17.2
  Bottom Layer w0.203: v1(4.5,71.223) 4.5,70.914 ccw(c7.04,70.914) 5.244,69.118 R21.1
NetD18_2: D18.2 R22.1 | length 3.8
  Top Layer w0.203: v1(9.25,63.25) D18.2
  Bottom Layer w0.203: v1(9.25,63.25) R22.1
NetD19_2: D19.2 R23.1 | length 3.8
  Top Layer w0.203: v1(16.25,56.25) D19.2
  Bottom Layer w0.203: v1(16.25,56.25) R23.1
NetD20_2: D20.2 R24.1 | length 3.8
  Top Layer w0.203: v1(23.25,49.25) D20.2
  Bottom Layer w0.203: v1(23.25,49.25) R24.1
NetPAD1_1: PAD1.1 R1.1 | length 13.8
  Top Layer w0.254: v1(30.75,50.25) 30.844,50.25 38.594,42.5 PAD1.1
  Bottom Layer w0.254: R1.1 30.543,50.551 30.75,50.344 v1(30.75,50.25)
NetR14_2: R14.2 U3.31 | length 2.8
  Bottom Layer w0.203: U3.31 53.93,54.328 53.93,52.672 R14.2
RESET_N: C12.2 J1.3 U3.4 | length 37.9
  Top Layer w0.203: v1(48.5,54.465) 52.265,54.465 67.4,69.6 67.4,72.9 65.3,75 v1(63.238,75)
  Bottom Layer w0.203: C12.2 v1(48.5,54.465) 48.424,54.541 48.424,55.055 48.25,55.229 48.25,55.625 U3.4 ; v1(63.238,75) J1.3
SWCLK: J1.4 U3.24 | length 19.4
  Bottom Layer w0.203: U3.24 67,70.981 67,73.635 J1.4
SWDIO: J1.2 U3.23 | length 17.1
  Bottom Layer w0.203: U3.23 66.25,71.363 66.25,73.115 J1.2
SWO: J1.6
VBAT: BT1.B+ C2.2 C3.2 R2.2 U1.1 U1.3 | length 20.3
  Bottom Layer w0.203: U1.1 20.859,64.391 21,64.25 22.64,64.25 22.759,64.369 U1.3
  Bottom Layer w0.508: R2.2 19.015,66.201 20.032,67.218 C3.2 ; U1.1 20.905,65.516 20.905,67.139 C3.2 ; BT1.B+ 25.357,74.522 24.011,73.176 C2.2 22.494,73.03 21.78,73.03 20.984,72.234 C3.2
WAKEUP: R11.2 U2.1 U3.6 | length 19.8
  Top Layer w0.203: v1(36.8,58.5) 48.5,58.5 v1(48.75,58.25)
  Bottom Layer w0.203: R11.2 v1(36.8,58.5) ; R11.2@32.35,58.3 32.498,58.152 32.498,58.076 32.695,57.879 U2.1
  Bottom Layer w0.254: U3.6 47.786,57.357 48.679,58.25 v1(48.75,58.25)
pads on no net: J1. U1.4 U3.2 U3.3

## Polygon pours and split planes (outlines as drawn)
GND on Top Layer "5V0_L-01_P-001" (solid, pour order 3): 2,30 78,30 78,97 2,97
GND on Bottom Layer "5V0_L-02_P-001" (solid, pour order 2): 2,30 78,30 78,97 2,97

## Other copper
Top Layer:
  pour cut-out: 40,30 26.679,43.321 32.929,49.571 cw(c40,42.5) 47.071,49.571 53.321,43.321
Bottom Layer:
  pour cut-out: 40,30 26.679,43.321 32.929,49.571 cw(c40,42.5) 47.071,49.571 53.321,43.321

## Silkscreen, mask and mechanical layers (free items; w line width, h text height)
Top Overlay:
  drawing of 865 lines, arcs and shapes, not listed
Top Solder:
  text "I love you  / Alyssa / <3" at -588.741,-1452.285 h3.3
Mechanical 1:
  the board outline again, w0.01